# Altium PCB CPLD_Breakout_Jig.PcbDoc
Units mm, origin at the board's own origin, x right, y up, seen from the top; angles counter-clockwise.
Board outline 72.64 x 33.4 mm, 2 copper layers (Top Layer, Bottom Layer), stack 1.671 mm thick; 7 components, 0 nets, 60 pads, 4 vias.
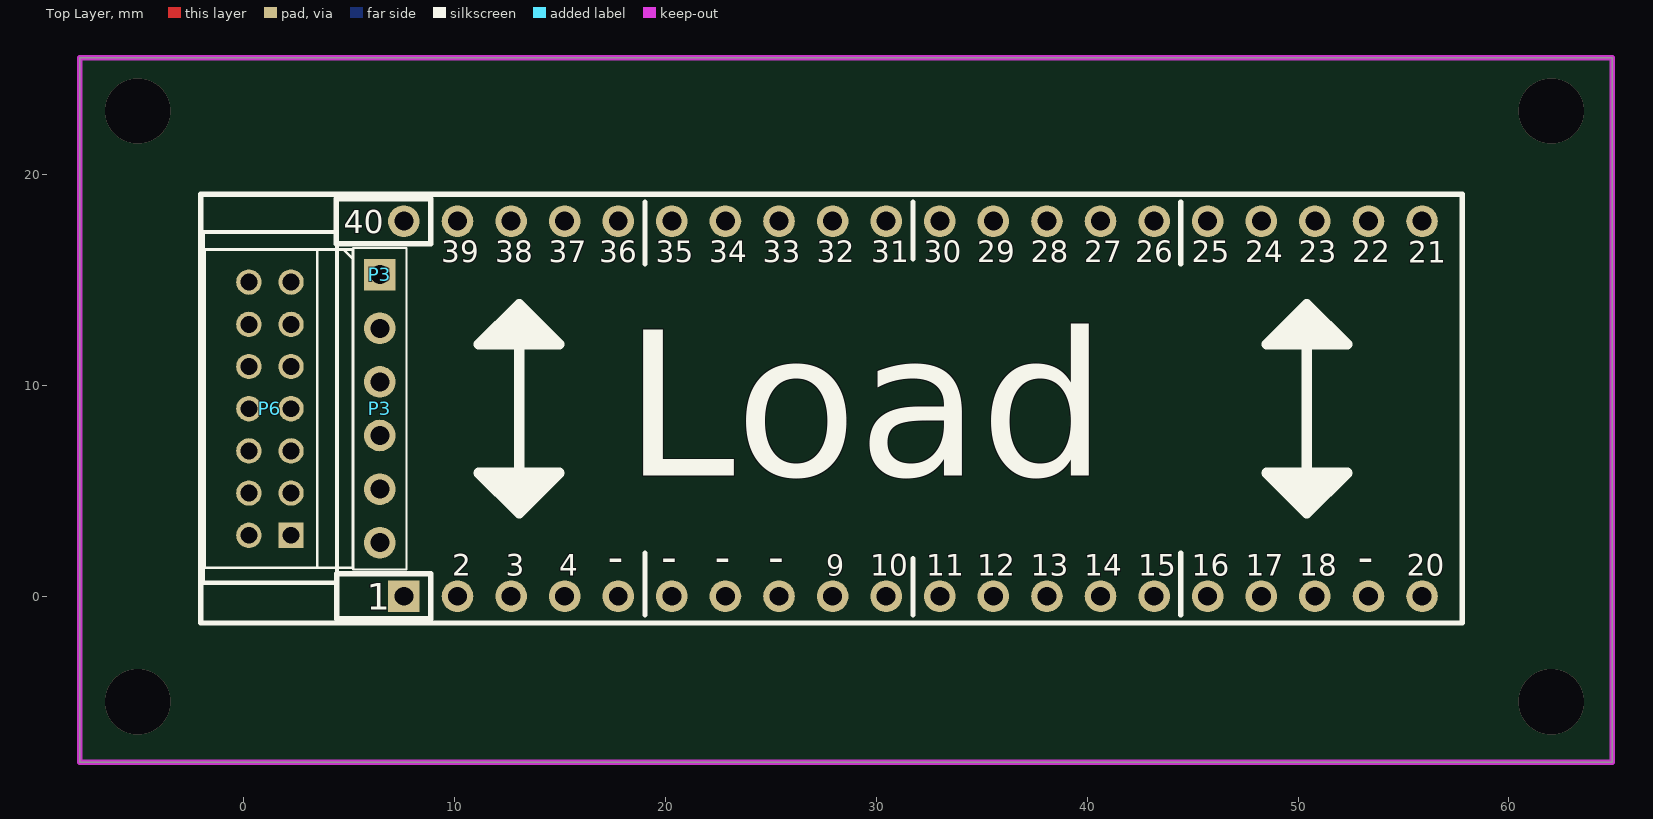
[diagram p0: Top Layer view]
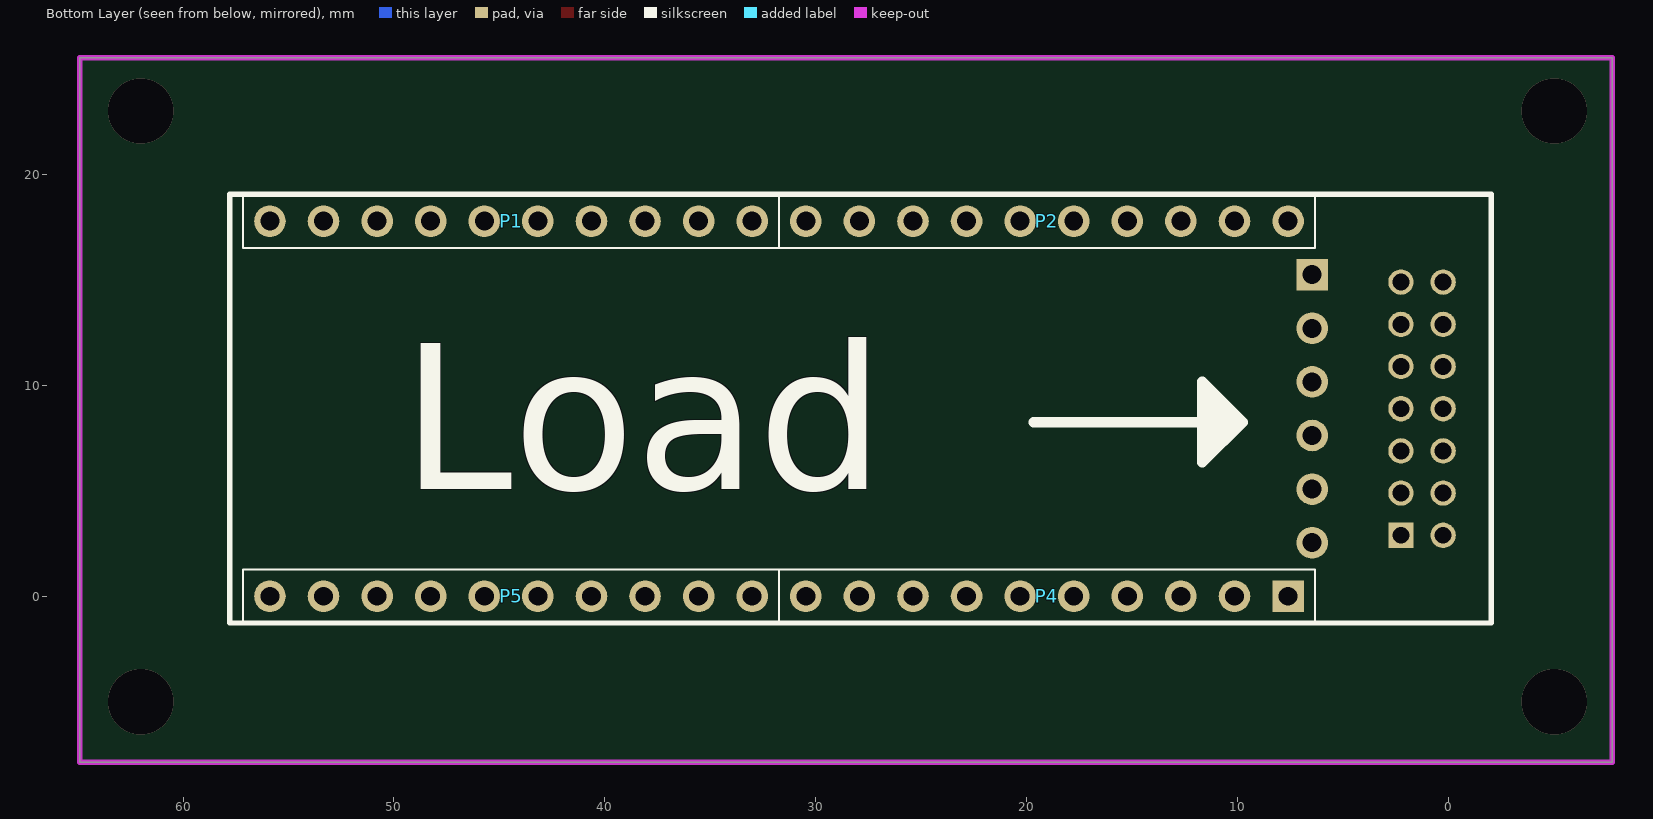
[diagram p1: Bottom Layer view, seen from below]

## Layer stack, top to bottom
Top Solder: solder mask 0.0102, Solder Resist, Dk 3.5
Top Layer: signal copper 0.0356
Dielectric 1: dielectric 1.6, FR-4, Dk 4.8
Bottom Layer: signal copper 0.0356
Bottom Solder: solder mask 0.0102, Solder Resist, Dk 3.5

## Board outline
-7.747,-7.874 64.897,-7.874 64.897,25.527 -7.747,25.527

## Design rules (kind name [scope] priority, off if disabled: settings)
Clearance [All] p1: gap=0.127 ignorepadtopadclearanceinfootprint=FALSE
HoleToHoleClearance [All] p1: gap=0.203 allowstackedmicrovias=TRUE
MinimumSolderMaskSliver [All] p1 off: minsoldermaskwidth=0.127
PolygonConnect PolygonConnect_Via [IsVia] p1: connectstyle=Direct reliefconductorwidth=0.254 reliefentries=4 polygonreliefangle="90 Angle" airgapwidth=0.254
PolygonConnect [All] p2: connectstyle=Relief reliefconductorwidth=0.254 reliefentries=4 polygonreliefangle="90 Angle" airgapwidth=0.254
RoomDefinition CPLD_Breakout [InComponentClass('CPLD_Breakout')] p1: confinementstyle=ConfineIn formatcopy=TRUE lockcomponents=FALSE outline -3.556,-3.175 61.468,-3.175 61.468,21.717 -3.556,21.717
RoutingVias [All] p1: holewidth=0.711 width=1.27 viastyle="Through Hole" minholewidth=0.711 minwidth=1.27 maxholewidth=0.711 maxwidth=1.27
SilkToSilkClearance [All] p1: silktosilkclearance=0.127
SilkToSolderMaskClearance [IsPad] p1: minsilkscreentomaskgap=0.127 clearancetoexposedcopper=TRUE
SolderMaskExpansion [All] p1: expansion=0.102
Width [All] p1: maxlimit=0.762 minlimit=0.254 preferedwidth=0.254
26 further rules are at their usual default settings.

## Classes and differential pairs
component class CPLD_Breakout: P1 P2 P3 P4 P5 P6

## Components (designator, comment, footprint, x,y, rotation, side; value= is the part's Value field where it differs from the comment)
P1 "Header, 10-Pin" HDR1X10S#1 55.88,17.78 r180 bottom
P2 "Header, 10-Pin" HDR1X10S#1 30.48,17.78 r180 bottom
P3 "=Description" HDR1X6S 6.477,15.24 r270 top locked
P3 "Header, 6-Pin, Right Angle" HDR1X6H 6.477,15.24 r270 top locked
P4 "Header, 10-Pin" HDR1X10S#2 7.62,0 r0 bottom
P5 "Header, 10-Pin" HDR1X10S#1 33.02,0 r0 bottom
P6 "XilinxJTAG" HEADER_2X7_2MM 1.27,8.89 r90 top locked

## Footprints (in the part's own frame and the unit in brackets; to place one, negate y for a bottom-side part, rotate by r counter-clockwise, add the part's x,y. Pads: shape width x height; smd on the part's side, far side on the other; paste and mask are expansions set on the pad)
HDR1X6H [mm] "Header; 6 Position; Right Angle"
  rect 1.5x1.5 hole 0.9: 1(0,0)
  round 1.5 hole 0.9: 2(2.54,0) 3(5.08,0) 4(7.62,0) 5(10.16,0) 6(12.7,0)
  silkscreen extent -1.19,-8.31 13.89,-1.27, body extent -1.27,-8.3 13.97,0.33, height 2.54
HDR1X6S [mm] "Header; 6 Position; Straight"
  silkscreen extent -1.27,-1.27 13.97,1.27, body extent -1.27,-1.27 13.97,1.27, height 6
HDR1X10S#1 [mm] "Header; 10 Position; Straight"
  round 1.5 hole 0.9: 1(0,0) 2(2.54,0) 3(5.08,0) 4(7.62,0) 5(10.16,0) 6(12.7,0) 7(15.24,0) 8(17.78,0) 9(20.32,0) 10(22.86,0)
  silkscreen extent -1.27,-1.27 24.13,1.27, body extent -1.27,-1.27 24.13,1.27, height 6
HDR1X10S#2 [mm] "Header; 10 Position; Straight"
  rect 1.5x1.5 hole 0.9: 1(0,0)
  round 1.5 hole 0.9: 2(2.54,0) 3(5.08,0) 4(7.62,0) 5(10.16,0) 6(12.7,0) 7(15.24,0) 8(17.78,0) 9(20.32,0) 10(22.86,0)
  silkscreen extent -1.27,-1.27 24.13,1.27, body extent -1.27,-1.27 24.13,1.27, height 6
HEADER_2X7_2MM [mm] "2x7 2mm Header"
  rect 1.2x1.2 hole 0.8: 1(-6,-1)
  round 1.2 hole 0.8: 2(-6,1) 3(-4,-1) 4(-4,1) 5(-2,-1) 6(-2,1) 7(0,-1) 8(0,1) 9(2,-1) 10(2,1) 11(4,-1) 12(4,1) 13(6,-1) 14(6,1)
  silkscreen extent -8.25,-3.18 8.38,3.18, body extent -8.23,-3.13 8.42,3.17, height 6.4

## Part data
P1 P2 P4 P5: library part "Header 1x10", LatestRevisionDate=17-Jul-2002, LatestRevisionNote="Re-released for DXP Platform.", Publisher="Altium Limited"
P3: library part "Header 1x6", "Header, 6-Pin", LatestRevisionDate=17-Jul-2002, LatestRevisionNote="Re-released for DXP Platform.", LCSC=*, Publisher="Altium Limited"
P3: library part "Header 1x6H", LatestRevisionDate=17-Jul-2002, LatestRevisionNote="Re-released for DXP Platform.", Publisher="Altium Limited"
P6: Digikey=WM14809-ND

## Via types
v1: diameter 3.1, hole 3.1, Top Layer to Bottom Layer, tented both sides, 4 vias

## Nets (pads, with @x,y where several pads share a name; then routed paths per layer and width w, separated by ;. In a path a pad name is that pad's centre, name@x,y a point inside that pad or via, vN(x,y) a via of type N, cw(c..) or ccw(c..) an arc to the next point about the centre after c; other vN are vias at no path point)
pads on no net: P1.1 P1.2 P1.3 P1.4 P1.5 P1.6 P1.7 P1.8 P1.9 P1.10 P2.1 P2.2 P2.3 P2.4 P2.5 P2.6 P2.7 P2.8 P2.9 P2.10 P3.1 P3.2 P3.3 P3.4 P3.5 P3.6 P4.1 P4.2 P4.3 P4.4 P4.5 P4.6 P4.7 P4.8 P4.9 P4.10 P5.1 P5.2 P5.3 P5.4 P5.5 P5.6 P5.7 P5.8 P5.9 P5.10 P6.1 P6.2 P6.3 P6.4 P6.5 P6.6 P6.7 P6.8 P6.9 P6.10 P6.11 P6.12 P6.13 P6.14
copper on no net:
  other v1: -5,-5 62,-5 -5,23 62,23

## Polygon pours and split planes (outlines as drawn)
no net on Top Overlay (solid): 13.081,13.843 14.986,11.938 11.176,11.938
no net on Top Overlay (solid): 13.081,3.937 14.986,5.842 11.176,5.842
no net on Top Overlay (solid): 50.419,3.937 48.514,5.842 52.324,5.842
no net on Top Overlay (solid): 50.419,13.843 48.514,11.938 52.324,11.938
no net on Top Overlay (solid): 47.879,19.812
no net on Top Overlay (solid): 16.967,1.88
no net on Bottom Overlay (solid): 9.779,8.255 11.684,10.16 11.684,6.35

## Keep-outs
Keep-Out Layer:
  the board outline again, w0.254

## Silkscreen, mask and mechanical layers (free items; w line width, h text height)
Top Overlay:
  lines w0.254: 19.05,-0.889 19.05,2.032 ; 19.05,15.748 19.05,18.669 ; 31.75,-0.889 31.75,1.778 ; 31.75,16.002 31.75,18.669 ; 44.45,-0.889 44.45,2.032 ; 44.45,15.748 44.45,18.669 ; -2.007,-1.27 57.785,-1.27 57.785,19.05 -2.007,19.05 -2.007,-1.27 ; 4.42,16.713 8.89,16.713 8.89,18.847 4.42,18.847 4.42,16.713 ; 4.445,-1.067 4.445,1.067 8.89,1.067 8.89,-1.067 4.445,-1.067
  lines w0.5: 13.081,3.937 14.986,5.842 11.176,5.842 13.081,3.937 ; 13.081,3.937 13.081,13.843 ; 13.081,13.843 14.986,11.938 11.176,11.938 13.081,13.843 ; 50.419,3.937 50.419,13.843 ; 50.419,3.937 52.324,5.842 48.514,5.842 50.419,3.937 ; 50.419,13.843 52.324,11.938 48.514,11.938 50.419,13.843
  text "40" at 4.775,17.196 h1.09
  text "39" at 9.398,15.824 h1.02
  text "38" at 11.938,15.824 h1.02
  text "37" at 14.478,15.824 h1.02
  text "36" at 16.891,15.824 h1.02
  text "35" at 19.558,15.824 h1.02
  text "34" at 22.098,15.824 h1.02
  text "33" at 24.638,15.824 h1.02
  text "32" at 27.178,15.824 h1.02
  text "31" at 29.769,15.824 h1.02
  text "30" at 32.258,15.824 h1.02
  text "29" at 34.798,15.824 h1.02
  text "28" at 37.338,15.824 h1.02
  text "27" at 39.878,15.824 h1.02
  text "26" at 42.291,15.824 h1.02
  text "25" at 44.958,15.824 h1.02
  text "24" at 47.498,15.824 h1.02
  text "23" at 50.038,15.824 h1.02
  text "22" at 52.578,15.824 h1.02
  text "21" at 55.22,15.799 h1.02
  text "Load" at 18.034,5.715 h7.62
  text "-" at 17.272,2.286 h1.52 r180
  text "-" at 19.812,2.286 h1.52 r180
  text "-" at 22.352,2.286 h1.52 r180
  text "-" at 24.892,2.286 h1.52 r180
  text "-" at 52.832,2.286 h1.52 r180
  text "2" at 9.906,0.965 h1.02
  text "3" at 12.446,0.965 h1.02
  text "4" at 14.986,0.965 h1.02
  text "9" at 27.635,0.965 h0.99
  text "10" at 29.718,0.965 h1.02
  text "11" at 32.385,0.965 h1.02
  text "12" at 34.798,0.965 h1.02
  text "13" at 37.338,0.965 h1.02
  text "14" at 39.878,0.965 h1.02
  text "15" at 42.418,0.965 h1.02
  text "16" at 44.958,0.965 h1.02
  text "17" at 47.523,0.965 h1.02
  text "18" at 50.063,0.965 h1.02
  text "20" at 55.143,0.965 h1.02
  text "1" at 5.867,-0.635 h1.27
Bottom Overlay:
  lines w0.254: -2.007,-1.27 57.785,-1.27 57.785,19.05 -2.007,19.05 -2.007,-1.27
  lines w0.5: 19.685,8.255 9.779,8.255 ; 9.779,8.255 11.684,10.16 11.684,6.35 9.779,8.255
  text "Load" at 49.657,5.08 h7.62